# EAGLE board mini_robot (EAGLE 6.6.0)
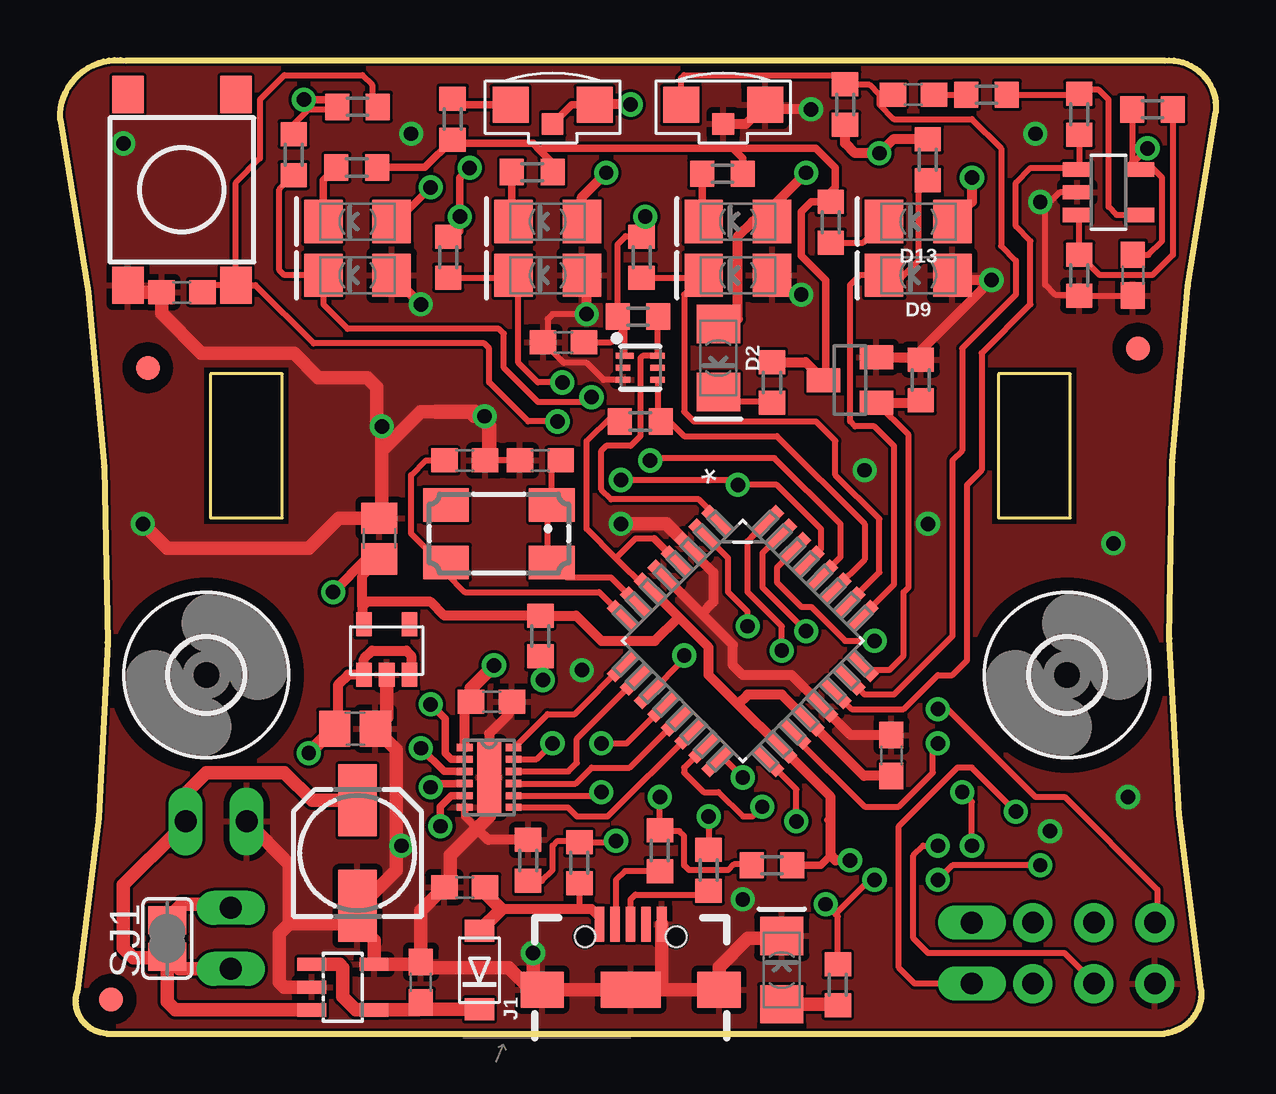
[diagram p0: board, top side]
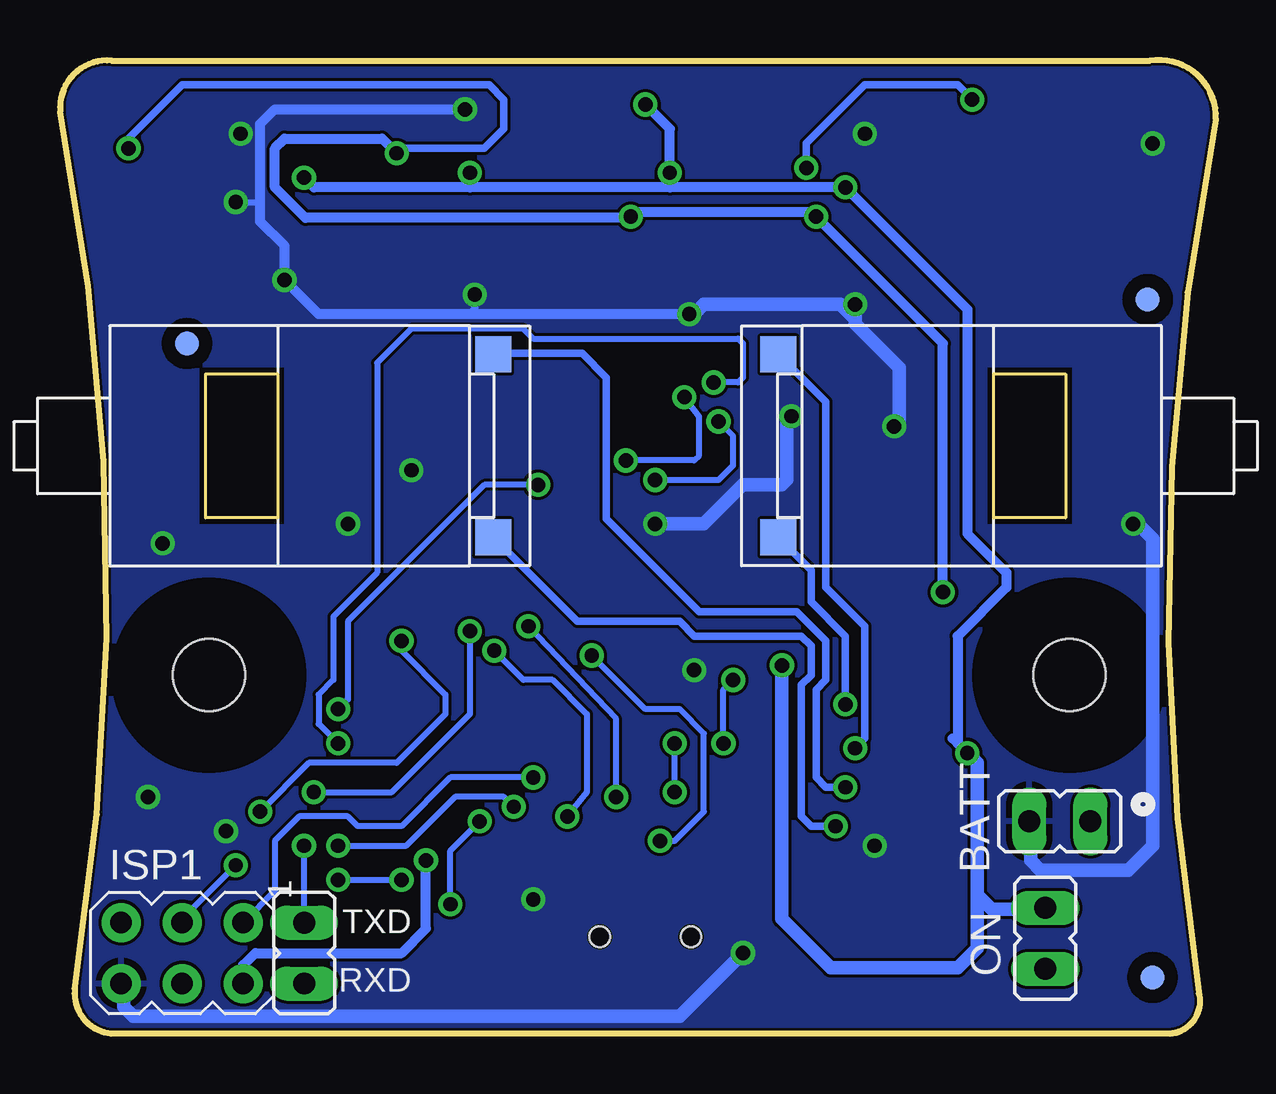
[diagram p1: board, bottom side, seen from below]

Size 48.17 x 40.56 mm. Coordinates in mm from the lower left corner, seen from the top.
Outline: 1.93,0 46.03,0 arc90 47.55,1.83 arc-20 48.16,38.41 arc100 46.03,40.54 2.74,40.54 arc100 0,38.1 arc-20 0.71,1.73 arc103 1.93,0
Copper layers (1*16): Top 0.035mm / dielectric 1.5mm / Bottom 0.035mm
Design rules "default *": minimum track width 5mil, minimum drill 24mil, track to track 5mil, track to pad 5mil, pad to pad 5mil, via to via 5mil, smd to smd 5mil, copper to edge 0.1mm, drill to drill 8mil, minimum pad ring 10mil, minimum via ring 8mil, stop-mask expansion 4mil, vias tented up to drill 0mil, thermal gap 10mil

## Footprints (pad centres in the part's own frame; a part is rotated, then mirrored left to right if it is on the bottom)
C0603 = smd 1.1 x 1: 1 -0.85,0; 2 0.85,0
C0805 = smd 1.3 x 1.5: 1 -0.85,0; 2 0.85,0
153CLV-0505 = smd 3 x 1.6: + 2.2,0; - -2.2,0
SOD-123FL = smd 0.91 x 1.22: A 1.637,0; C -1.637,0
FKIT-LED-1206 = smd 1.6 x 1.803: A -1.422,0; C 1.422,0
3,0 = hole 3: 0,0
SOT23-5 = smd 0.6 x 1.2: 1 -0.95,-1.306; 2 0,-1.306; 3 0.95,-1.306; 4 0.95,1.306; 5 -0.95,1.306
SOT23-5L = smd 0.55 x 1.2: 1 -0.95,-1.3; 2 0,-1.3; 3 0.95,-1.3; 4 0.95,1.3; 5 -0.95,1.3
AVRISP = drill 0.9 pad 1.626: 1 -1.27,2.54; 2 1.27,2.54; 3 -1.27,0; 4 1.27,0; 5 -1.27,-2.54; 6 1.27,-2.54
USB-B-MICRO-SMD = smd 1.45 x 0.4: D+ 2.725,0; D- 2.725,0.65; GND 2.725,-1.3; ID 2.725,-0.65; VBUS 2.725,1.3 | smd 1.5 x 1.8: SHIELD1 0,3.685; SHIELD2 0,-3.685 | smd 1.5 x 2.5: SHIELD3 0,0 | hole 0.85: 2.2,1.9; 2.2,-1.9
JP1 = drill 0.914 long: 1 0,-1.27; 2 0,1.27
SOT23 = smd 1 x 1.4: 1 -0.95,-1.1; 2 0.95,-1.1; 3 0,1.1
CTS406 = smd 1.9 x 1.4: 1 -2.2,-1.2; 2 2.2,-1.2; 3 2.2,1.2; 4 -2.2,1.2
R0603 = smd 1 x 1.1: 1 -0.85,0; 2 0.85,0
TACTILE_SWITCH_SMD_6.2MM_TALL = smd 1.55 x 1.3: A1 -3.975,-2.25; A2 3.975,-2.25; B1 -3.975,2.25; B2 3.975,2.25
SJ = smd 1.168 x 1.6: 1 -0.762,0; 2 0.762,0
ODFN-6 = smd 0.75 x 0.25: 1 -0.645,0.5 | smd 0.6 x 0.25: 2 -0.72,0; 3 -0.72,-0.5; 4 0.72,-0.5; 5 0.72,0; 6 0.72,0.5
SON50P200X300X80-13N = smd 0.66 x 0.305: 1 -1.016,1.245; 2 -1.016,0.762; 3 -1.016,0.254; 4 -1.016,-0.254; 5 -1.016,-0.762; 6 -1.016,-1.245; 7 1.016,-1.245; 8 1.016,-0.762; 9 1.016,-0.254; 10 1.016,0.254; 11 1.016,0.762; 12 1.016,1.245 | smd 0.991 x 3.099: 13 0,0
QFP80P900X900X120-32N = smd 1.473 x 0.508: 1 -4.242,2.794; 2 -4.242,2.007; 3 -4.242,1.194; 4 -4.242,0.406; 5 -4.242,-0.406; 6 -4.242,-1.194; 7 -4.242,-2.007; 8 -4.242,-2.794; 17 4.242,-2.794; 18 4.242,-2.007; 19 4.242,-1.194; 20 4.242,-0.406; 21 4.242,0.406; 22 4.242,1.194; 23 4.242,2.007; 24 4.242,2.794 | smd 0.508 x 1.473: 9 -2.794,-4.242; 10 -2.007,-4.242; 11 -1.194,-4.242; 12 -0.406,-4.242; 13 0.406,-4.242; 14 1.194,-4.242; 15 2.007,-4.242; 16 2.794,-4.242; 25 2.794,4.242; 26 2.007,4.242; 27 1.194,4.242; 28 0.406,4.242; 29 -0.406,4.242; 30 -1.194,4.242; 31 -2.007,4.242; 32 -2.794,4.242
FIDUCIAL_1MM = smd 1 x 1: 1 0,0
KPA3010 = smd 1.5 x 1.5: P$1_COL -1.75,0.8; P$2_EM 1.75,0.8 | smd 0.9 x 0.9: P$3-NC 0,0
PLANETARY_GEAR_MOTOR = smd 1.5 x 1.5: P$1 -13.97,3.81; P$2 -13.97,-3.81
SOT23-5' = smd 0.66 x 1: P$1 0.95,1; P$2 0,1; P$3 -0.95,1; P$4 -0.95,-1.1; P$5 0.95,-1.1

## Placement (x,y rotation side)
C1  100n  [C0603]  35.56,39.12 0 top
C2  100n  [C0603]  44.7,31.6 270 top
C3  1uF  [C0805]  13.31,20.62 90 top
C4  1uF  [C0805]  12.29,12.7 0 top
C5  1uF  [C0603]  15.04,2.13 90 top
C6  100n  [C0603]  5.08,30.89 180 top
C7  22uF  [153CLV-0505]  12.4,7.52 90 top
C8  18p  [C0603]  16.87,23.88 0 top
C9  18p  [C0603]  20.02,23.88 180 top
C10  100n  [C0603]  17.98,13.82 0 top
C11  100n  [C0603]  16.87,6.1 180 top
C12  100n  [C0603]  34.65,11.58 90 top
C13  100n  [C0603]  20.98,28.8 180 top
D1  [SOD-123FL]  17.48,2.64 90 top
D2  [FKIT-LED-1206]  27.43,28.14 270 top
D3  [FKIT-LED-1206]  30.07,2.64 90 top
D5  [FKIT-LED-1206]  12.4,31.6 180 top
D7  [FKIT-LED-1206]  20.32,31.6 180 top
D8  [FKIT-LED-1206]  28.24,31.6 180 top
D9  [FKIT-LED-1206]  35.76,31.6 180 top
D10  [FKIT-LED-1206]  12.4,33.83 180 top
D11  [FKIT-LED-1206]  20.32,33.83 180 top
D12  [FKIT-LED-1206]  28.24,33.83 180 top
D13  [FKIT-LED-1206]  35.76,33.83 180 top
H1  MOUNT-HOLE3.0  [3,0]  6.1,14.94 0 top
H2  MOUNT-HOLE3.0  [3,0]  41.96,14.94 0 top
IC2  MCP601OT  [SOT23-5]  43.69,35.05 270 top
IC3  MCP73811/2  [SOT23-5L]  11.79,1.93 270 top
ISP1  AVRISP-6  [AVRISP]  43.08,3.35 270 bottom
J1  [USB-B-MICRO-SMD]  23.77,1.83 90 top
JP1  ON  [JP1]  7.11,3.96 0 bottom
JP2  BATT  [JP1]  6.5,8.84 90 bottom
Q1  BSS123  [SOT23]  32.92,27.23 90 top
Q2  12MHz  [CTS406]  18.29,20.83 180 top
R1  47k  [R0603]  38.61,39.12 0 top
R2  4k7  [R0603]  21.64,7.11 270 top
R3  4k7  [R0603]  12.4,38.61 180 top
R4  4k7  [R0603]  24.08,29.87 0 top
R5  4k7  [R0603]  24.18,25.5 0 top
R6  470k  [R0603]  42.47,38.3 270 top
R7  47k  [R0603]  45.52,38.51 180 top
R8  47k  [R0603]  9.74,36.62 90 top
R9  330  [R0603]  12.36,36.08 180 top
R10  47k  [R0603]  16.18,32.34 90 top
R11  330  [R0603]  19.68,35.89 180 top
R12  47k  [R0603]  24.24,32.34 90 top
R13  330  [R0603]  27.6,35.82 180 top
R14  47k  [R0603]  36.16,36.4 90 top
R15  330  [R0603]  32.11,33.8 270 top
R16  330  [R0603]  16.36,38.1 90 top
R17  4k7  [R0603]  35.86,27.23 270 top
R18  47k  [R0603]  42.47,31.6 90 top
R19  330  [R0603]  32.41,2.03 90 top
R20  4k7  [R0603]  20.02,16.56 270 top
R21  330  [R0603]  29.67,27.13 270 top
R22  4k7  [R0603]  19.51,7.21 90 top
R27  68  [R0603]  24.99,7.62 270 top
R28  68  [R0603]  27.03,6.81 270 top
R29  47k  [R0603]  32.72,38.71 270 top
R30  1K5  [R0603]  29.67,7.01 180 top
S1  MOMENTARY-SWITCH-SPST-SMD-6.2MM-TALL  [TACTILE_SWITCH_SMD_6.2MM_TALL]  5.08,35.15 270 top
SJ1  [SJ]  4.47,3.96 90 top
U1  ISL29125  [ODFN-6]  24.18,27.74 0 top
U2  DRV8836DSSR  [SON50P200X300X80-13N]  17.88,10.67 0 top
U3  ATMEGA328-AU  [QFP80P900X900X120-32N]  28.45,16.36 315 top
U$1  FIDUCIAL  [FIDUCIAL_1MM]  3.66,27.74 0 top
U$2  KPA3010  [KPA3010]  27.64,37.9 0 top
U$3  FIDUCIAL  [FIDUCIAL_1MM]  44.91,28.55 0 top
U$4  FIDUCIAL  [FIDUCIAL_1MM]  2.13,1.42 0 top
U$5  FIDUCIAL  [FIDUCIAL_1MM]  42.88,28.75 0 bottom
U$6  FIDUCIAL  [FIDUCIAL_1MM]  2.64,2.34 0 bottom
U$7  FIDUCIAL  [FIDUCIAL_1MM]  2.84,30.58 0 bottom
U$8  PLANETARY_GEAR_MOTOR  [PLANETARY_GEAR_MOTOR]  4.27,24.49 0 bottom
U$9  PLANETARY_GEAR_MOTOR  [PLANETARY_GEAR_MOTOR]  44.09,24.49 180 bottom
U$10  KPA3010_EM  [KPA3010]  20.52,37.9 0 top
U$11  MIC5504-3.3Y  [SOT23-5']  13.61,15.95 180 top
USART  [JP1]  38,3.35 0 bottom

## Library data of the parts
C1-C13 R1-R22 R27-R30 = resistor
D1 IC3 ISP1 U$1 U$3-U$7 = adafruit
D2 D3 D5 D7-D13 = SparkFun-LED
H1 H2 = holes
IC2 = linear
J1 = SparkFun-Connectors; PROD_ID: CONN-11752
JP1 JP2 SJ1 USART = jumper
Q1 = transistor-small-signal
Q2 = adafruit; OC_FARNELL: unknown; OC_NEWARK: unknown
S1 = SparkFun-Switches; PROD_ID: SWCH-11966; SF_SKU: COM-12992
U1 = SparkFun-Sensors; PROD_ID: IC-12055
U2 = my_parts; MPN: DRV8836DSSR; OC_FARNELL: 2115236; OC_NEWARK: 94T6066; PACKAGE: SON-12; SUPPLIER: TEXAS INSTRUMENTS
U3 = my_parts; MPN: ATMEGA328-AU; OC_FARNELL: 1972086; OC_NEWARK: 68T2926; PACKAGE: TQFP-32; SUPPLIER: ATMEL
U$2 U$8-U$11 = my_parts

## Nets
+3V3: C2.1 C3.1 C12.1 C13.1 IC2.5 ISP1.2 R3.2 R4.1 R5.1 R7.2 R8.2 R10.2 R12.2 R14.2 R20.1 R29.2 R30.1 U1.1 U3.4 U3.6 U3.18 U3.20 U$11.P$5
ADC0: C1.1 R29.1 U3.23 U$2.P$1_COL
ADC2: D9.C R14.1 U3.25
ADC3: D8.C R12.1 U3.26
ADC5: D5.C R8.1 U3.28
ADC6: D7.C R10.1 U3.19
ADC7: IC2.1 R6.2 U3.22
APWM: U2.9 U3.13
AWAY: U2.10 U3.10
BOOT: R2.1 R22.1 U3.11
BPWM: U2.7 U3.14
BWAY: U2.8 U3.12
DM: R27.1 R30.2 U3.2
DP: R28.1 U3.32
GND: C2.2 C3.2 C4.2 C5.2 C6.2 C7.- C8.2 C9.2 C10.2 C11.2 C12.2 C13.2 D3.C D5.A D7.A D8.A D9.A IC2.2 IC3.2 IC3.5 ISP1.6 J1.GND J1.SHIELD1 J1.SHIELD2 J1.SHIELD3 JP2.2 Q1.2 R17.1 R18.1 R22.2 S1.A2 U1.3 U2.6 U2.13 U3.3 U3.5 U3.21 U$2.P$2_EM U$2.P$3-NC U$11.P$2
LED_CONTROLL: Q1.3 R9.1 R11.1 R13.1 R15.1 R16.1 R21.1
LED_CONTROLL_G: Q1.1 R17.2 U3.24
MISO: ISP1.1 U3.16
MOSI: ISP1.4 U3.15
N$1: U2.2 U$8.P$2
N$2: U2.3 U$8.P$1
N$3: U2.4 U$9.P$2
N$4: U2.5 U$9.P$1
N$5: C11.1 D1.A J1.VBUS R2.2
N$6: C5.1 D1.C IC3.1 IC3.4
N$7: C1.2 R1.1
N$9: C7.+ IC3.3 JP1.1 JP2.1 SJ1.1
N$10: R20.2 U2.11
N$11: D10.C R9.2
N$12: D11.C R11.2
N$13: D12.C R13.2
N$14: D13.C R15.2
N$16: R16.2 U$10.P$1_COL
N$17: C8.1 Q2.3 U3.8
N$18: C9.1 Q2.1 U3.7
N$19: D3.A R19.1
N$20: IC2.3 R7.1 R18.2
N$21: IC2.4 R1.2 R6.1
N$22: D2.C R21.2
N$23: J1.D- R27.2
N$24: J1.D+ R28.2
NSLEEP: U2.12 U3.9
RESET: C6.1 ISP1.5 R3.1 S1.B2 U3.29
RXD: U3.30 USART.1
SCK: ISP1.3 R19.2 U3.17
SCL: R4.2 U1.6 U3.1
SDA: R5.2 U1.4 U3.27
TXD: U3.31 USART.2
VCC: C4.1 C10.1 D2.A D10.A D11.A D12.A D13.A JP1.2 SJ1.2 U2.1 U$10.P$2_EM U$10.P$3-NC U$11.P$1 U$11.P$3

## Tracks (layer width: path | path; a pad name or v marks a point on that pad's centre or on a via)
+3V3  (via drill 0.6)
  Top 0.254: R8.2 9.74,37.88 10.36,38.51 11.44,38.51 R3.2 | R12.2 24.2,33.22 23.57,33.22 23.23,32.88 R4.1 23.54,29.56 23.54,29.36 | U1.1 23.54,29.36 | C13.1 22.98,28.8 23.54,29.36 | 31.97,8.9 32.11,9.04 | R7.2 44.67,36.33 | 44.67,36.33 IC2.5 45.06,36.07 45.52,36.07 45.92,35.66 45.92,33.02 45.35,32.45 C2.1 | 44.67,36.33 44.76,36.33 v45.31,36.88 | R5.1 22.96,25.71 21.95,24.69 21.95,21.03 23.17,19.81 | 24.6,18.58 24.4,18.58 23.17,19.81 | 24.76,20.63 23.98,20.63 23.17,19.81
  Top 0.305: U3.6 24.6,18.58 | 24.76,20.63 U3.4 | R30.1 31.7,7.01 32.11,7.42 | R10.2 16.43,33.19 16.66,33.43 16.66,33.68 16.66,35.66 v17.07,36.07 | v10.16,38.91 11.24,38.91 R3.2
  Top 0.406: 28.25,13.72 30.02,11.94 U3.18 32.11,9.86 32.11,9.04 32.11,7.42 32.31,7.21 v32.92,7.21 | 28.25,13.72 27.03,14.94 27.03,16.09 25.78,17.34 | 25.78,17.34 U3.6 | 25.78,17.34 24.79,16.36 22.56,16.36 21.5,17.41 R20.1 16.02,17.41 15.44,17.98 12.8,17.98 12.6,17.78 | v16.66,34.04 16.66,33.68 | R29.2 32.72,37.08 33.12,36.68 v34.14,36.68 34.72,37.26 R14.2 | R12.2 24.24,33.89 v24.38,34.04 | 28.25,13.72 28.65,14.12 30.07,14.12 31.13,13.07 U3.20 33.5,10.73 C12.1 | 12.6,17.78 12.6,17.12 U$11.P$5 | v11.38,18.39 12.76,19.78 C3.1 12.6,19.06 12.6,17.78
  Bottom 0.305: v17.07,36.07 17.07,37.08 14.63,39.52 10.77,39.52 v10.16,38.91 | v45.31,36.88 45.31,37.29 43.08,39.52 30.28,39.52 29.67,38.91 29.67,37.69 30.48,36.88 33.93,36.88 v34.14,36.68
  Bottom 0.406: ISP1.2 40.54,2.85 40.03,3.35 33.93,3.35 32.92,4.37 v32.92,7.21 | 24.24,33.98 24.59,33.98 | 24.59,33.98 37.94,33.98 39.22,35.26 39.22,36.88 38.81,37.29 34.75,37.29 v34.14,36.68 | 24.59,33.98 24.38,34.18 v24.38,34.04 24.18,34.24 16.87,34.24 v16.66,34.04 11.38,28.75 v11.38,18.39
ADC0
  Top 0.254: U$2.P$1_COL 25.89,39.8 26.01,39.93 32.35,39.93 R29.1 32.75,39.52 33.73,39.52 34.14,39.12 | C1.1 34.14,39.12 | 34.14,39.12 34.14,38.71 34.75,38.1 38,38.1 39.22,36.88 39.22,32.82 39.83,32.21 39.83,30.79 37.59,28.55 37.59,24.28 37.19,23.88 37.19,16.56 34.75,14.12 33.52,14.12 U3.23
ADC2
  Top 0.254: R14.1 36.16,35.45 35.76,35.05 35.76,32.21 34.95,31.39 34.54,31.39 D9.C 33.33,31.6 32.92,31.19 32.92,25.5 33.12,25.3 33.93,25.3 34.75,24.49 34.75,18.71 U3.25
ADC3
  Top 0.254: U3.26 34.14,19.21 34.14,21.44 32.31,23.27 32.31,24.69 31.5,25.5 26.42,25.5 26.01,25.91 26.01,30.78 D8.C 26.72,31.49 | R12.1 26.72,31.49 | 26.72,31.49 26.72,30.88
ADC5  (via drill 0.6)
  Top 0.254: R8.1 9.14,35.17 9.14,31.8 9.35,31.6 D5.C 10.97,30.38 11.99,29.36 18.29,29.36 18.49,29.16 18.49,27.74 19.91,26.31 21.95,26.31 v22.15,26.52 | U3.28 32.51,19.85 32.51,21.23 29.77,23.98 24.69,23.98 v24.59,23.88
  Bottom 0.254: v22.15,26.52 21.54,25.71 21.54,24.08 21.74,23.88 v24.59,23.88
ADC6  (via drill 0.6)
  Top 0.254: R10.1 18.79,31.49 D7.C 19.1,31.4 19.1,27.94 19.91,27.13 v20.93,27.13 | U3.19 30.6,12.37 33.53,9.45 34.95,9.45 36.37,10.87 36.37,11.89 v36.58,12.09
  Bottom 0.254: v20.93,27.13 19.91,27.13 19.71,27.33 19.71,28.75 19.91,28.96 28.45,28.96 28.85,29.36 33.53,29.36 34.95,27.94 34.95,19.2 36.78,17.37 36.78,14.73 37.39,14.12 37.39,12.9 v36.58,12.09
ADC7
  Top 0.254: U3.22 32.98,13.51 35.15,13.51 36.58,14.94 37.19,14.94 37.8,15.55 37.8,22.86 38.41,23.47 38.41,28.35 40.44,30.38 40.44,33.02 39.83,33.63 39.83,35.46 40.44,36.07 42.32,36.07 IC2.1 42.47,36.09 R6.2
APWM
  Top 0.254: U2.9 21.49,10.41 22.15,11.07 23.74,11.07 U3.13
AWAY
  Top 0.254: U2.10 21.18,10.92 21.54,11.28 21.54,12.29 U3.10
BOOT  (via drill 0.6)
  Top 0.254: R22.1 20.08,6.36 20.52,6.81 20.52,7.82 20.73,8.03 21.58,8.03 R2.1 23.1,7.96 v23.17,8.03 | v26.01,15.75 26.01,15.61 U3.11
  Bottom 0.254: v23.17,8.03 22.56,8.03 21.34,9.25 21.34,12.5 22.35,13.51 23.77,13.51 v26.01,15.75
BPWM
  Top 0.254: U3.14 22.82,9.04 21.54,9.04 21.16,9.42 U2.7
BWAY  (via drill 0.6)
  Top 0.254: U2.8 22.4,9.91 v22.56,10.06 | v22.56,12.09 23.61,12.09 U3.12
  Bottom 0.254: v22.56,10.06 v22.56,12.09
DM  (via drill 0.6)
  Top 0.254: R30.2 28.82,7.05 28.08,7.05 27.84,6.81 26.21,6.81 26.01,7.01 26.01,8.23 25.81,8.43 25.03,8.43 R27.1 v24.99,9.86 | v28.65,16.97 28.65,17.58 27.84,18.39 27.84,19.81 U3.2
  Bottom 0.254: v24.99,9.86 24.99,13.11 v28.65,16.97
DP  (via drill 0.6)
  Top 0.254: v27.03,9.04 R28.1 | 28.81,20.67 U3.32 28.65,20.51 28.65,18.39 30.07,16.97 v30.07,15.95
  Bottom 0.254: v30.07,15.95 28.85,14.73 27.64,14.73 26.21,13.31 26.21,10.06 v27.03,9.04
GND  (via drill 0.6)
  Top 0.254: C9.2 C8.2 | U1.3 22.65,27.24 21.95,27.94 20.99,27.94 C13.2 20.32,28.99 20.32,29.77 20.52,29.97 v21.95,29.97 | C2.2 R18.1 42.43,30.79 41.45,30.79 41.05,31.19 41.05,34.44 v40.84,34.65 41.25,34.65 41.66,35.05 IC2.2
  Top 0.305: U2.6 16.87,9.04 17.37,8.53 | 18.69,13.68 C10.2 | U3.5 25.16,19.04 26.42,17.78 | v30.89,30.79 30.48,30.79 D8.A
  Top 0.406: R22.2 17.84,8.06 17.37,8.53 | 26.74,17.49 28.04,16.19 28.04,15.34 28.45,14.94 30.48,14.94 31.74,13.68 U3.21 32.95,12.43 C12.2 | 26.74,17.49 U3.5 | 26.23,20.2 U3.3 26.29,20.14 27.23,19.2 27.23,17.98 26.74,17.49 | v17.69,25.72 17.58,25.6 | U$2.P$3-NC 28.59,37.9 U$2.P$2_EM 29.58,38.51 v31.29,38.51 | D5.A | D5.A v15.04,30.38 | v21.95,29.97 21.95,31.39 D7.A | D9.A 37.39,31.39 v38.81,31.39 35.6,28.18 Q1.2 35.77,28.18 R17.1 | 18.69,13.68 18.69,13.31 17.88,12.5 U2.13
  Top 0.559: 11.85,4.78 12.02,4.95 | 12.02,4.95 C7.- | 12.02,4.95 13.09,3.88 IC3.5 15.14,2.88 C5.2 | J1.SHIELD1 19.61,1.83 18.69,2.74 15.28,2.74 C5.2 | J1.SHIELD1 J1.SHIELD3 25.2,1.83 | 25.2,1.83 J1.SHIELD2 27.46,2.77 28.65,3.96 29.97,3.96 D3.C | J1.GND 25.07,1.95 25.2,1.83 | U2.13 17.88,9.04 17.37,8.53 16.26,7.42 16.26,6.34 C11.2 15.04,5.12 C5.2 | C7.- 12.46,5.39 12.6,5.39 14.02,6.81 14.02,11.82 C4.2 13.61,13.17 U$11.P$2 | v19.71,3.35 19.71,2.21 J1.SHIELD1 | IC3.2 9.35,1.93 9.14,2.13 9.14,4.17 9.55,4.57 | 9.55,4.57 11.65,4.57 C7.- | 9.55,4.57 9.55,7.06 JP2.2 | S1.A2 3.12,30.89 C6.2 4.23,30.01 5.89,28.35 9.75,28.35 10.77,27.33 12.8,27.33 13.21,26.92 13.21,25.5 v13.41,25.3 13.41,24.28 | v17.69,25.72 17.26,25.72 17.07,25.91 | 15.65,25.91 15.04,25.91 13.41,24.28 | 13.41,24.28 13.41,21.58 C3.2 11.62,21.48 10.36,20.22 4.47,20.22 v3.45,21.23 | v23.37,21.23 25.26,21.23 U3.3
  Top 0.61: 15.65,25.91 17.07,25.91 17.27,25.91 17.58,25.6 17.88,25.3 17.88,24.04 C8.2
  Bottom 0.254: v40.84,34.65 39.83,34.65
  Bottom 0.305: v30.89,30.79 30.89,30.18 31.09,29.97
  Bottom 0.406: v21.95,29.97 31.09,29.97 37.39,29.97 v38.81,31.39 38.81,32.82 39.83,33.83 39.83,34.65 39.83,37.9 39.22,38.51 v31.29,38.51
  Bottom 0.559: v19.71,3.35 22.35,0.71 45.11,0.71 45.52,1.12 45.52,1.98 ISP1.6 | v15.04,30.38 15.04,29.77 | 15.04,29.77 15.04,29.57 13.21,27.74 13.21,25.5 v13.41,25.3 | v21.95,29.97 21.74,29.97 21.34,30.38 15.65,30.38 15.04,29.77 | v3.45,21.23 3.25,21.23 2.64,20.63 2.64,7.82 3.66,6.81 7.32,6.81 7.72,7.21 7.72,8.79 JP2.2 | v17.69,25.72 17.88,25.53 17.88,23.06 18.09,22.86 19.71,22.86 21.34,21.23 v23.37,21.23
  other vias: 43.89,20.42 41.25,8.43 28.45,5.59 14.22,7.82 2.64,37.08 14.63,37.49 33.53,23.47 44.5,9.86 40.64,37.49 36.17,21.23 21.74,15.14
  pour Top: -1.63,42.98 55.27,42.98 55.27,-4.17 -1.63,-4.17
  pour Bottom: -9.96,44.2 52.22,44.2 52.22,-10.87 -9.96,-10.87
LED_CONTROLL
  Top 0.305: R11.1 20.53,36.27 20.02,36.78 | 20.02,36.78 19.71,37.08 16.52,37.08 R16.1 15.19,36.09 R9.1 | R13.1 28.45,36.47 28.04,36.88 | 28.04,36.88 20.12,36.88 20.02,36.78 | R15.1 31.71,34.65 | 31.71,34.65 32.31,35.26 32.31,36.07 31.5,36.88 28.04,36.88 | 31.71,34.65 31.3,34.65 30.89,34.24 30.89,32.41 31.9,31.39 31.9,27.31 Q1.3
  Top 0.406: R21.1 31.07,27.98 Q1.3
LED_CONTROLL_G
  Top 0.254: 36,26.28 Q1.1 35.36,24.94 35.36,18.59 35.15,18.39 35.15,15.75 34.54,15.14 33.62,15.14 U3.24 33.82,14.94
  Top 0.406: Q1.1 35.77,26.28 R17.2
MISO  (via drill 0.6)
  Top 0.254: U3.16 27.73,11.38 v28.45,10.67
  Bottom 0.254: ISP1.1 39.19,5.97 39.22,5.99 39.22,8.03 38.2,9.04 36.17,9.04 35.76,8.64 33.93,8.64 31.9,10.67 v28.45,10.67
MOSI  (via drill 0.6)
  Top 0.254: ISP1.4 43.08,2.13 41.86,3.35 36.17,3.35 35.56,3.96 35.56,7.42 35.97,7.82 v36.58,7.82 | U3.15 26.01,11.07 26.01,10.87 26.82,10.06 27.43,10.06 28.45,9.04 28.85,9.04 v29.26,9.45
  Bottom 0.254: v29.26,9.45 29.67,9.86 31.7,9.86 33.73,7.82 v36.58,7.82
N$1  (via drill 0.6)
  Top 0.305: U2.2 16.31,11.43 16.05,11.68 16.05,13.11 v15.44,13.72
  Bottom 0.305: v15.44,13.72 15.44,16.56 16.87,17.98 16.87,19.3 U$8.P$2
N$2  (via drill 0.6)
  Top 0.305: U2.3 16,10.92 v15.04,11.89
  Bottom 0.305: U$8.P$1 16.26,26.31 16.26,18.59 14.63,16.97 14.63,12.29 v15.04,11.89
N$3  (via drill 0.6)
  Top 0.305: U2.4 15.6,10.41 v15.44,10.26
  Bottom 0.305: v15.44,10.26 16.26,10.26 16.66,10.67 16.66,14.33 16.26,14.73 16.26,16.36 17.48,17.58 21.54,17.58 25.4,21.44 25.4,27.33 26.42,28.35 30.07,28.35 U$9.P$2 30.28,28.14
N$4  (via drill 0.6)
  Top 0.305: U2.5 16.31,9.91 15.85,9.45 v15.85,8.64
  Bottom 0.305: v15.85,8.64 16.87,8.64 17.27,9.04 17.27,14.53 16.87,14.94 16.87,16.15 17.27,16.56 21.74,16.56 22.35,17.17 26.62,17.17 U$9.P$1
N$5
  Top 0.254: R2.2 21.64,5.28 21.74,5.18
  Top 0.406: 18.38,5.18 21.74,5.18 22.15,5.18 22.47,4.86 J1.VBUS
  Top 0.559: D1.A 18.38,5.18 17.72,5.84 C11.1
N$6
  Top 0.559: IC3.1 11.65,2.88 11.79,2.74 11.79,1.52 12.33,0.98 IC3.4 14.94,0.98 C5.1 15.32,1 D1.C
N$7
  Top 0.254: C1.2 R1.1
N$9
  Top 0.559: C7.+ 10.5,9.72 9.35,10.87 6.1,10.87 5.28,10.06 5.28,8.89 JP2.1 4.88,8.48 4.88,8.43 2.64,6.2 2.64,3.56 3.05,3.15 4.42,3.15 SJ1.1 | IC3.3 4.81,0.98 4.47,1.32 SJ1.1 | JP1.1 4.98,2.69 SJ1.1
N$10  (via drill 0.6)
  Top 0.254: U2.11 19.86,11.43 v20.52,12.09 | v20.12,14.73 20.12,15.61 R20.2
  Bottom 0.254: v20.52,12.09 20.52,14.33 v20.12,14.73
N$11
  Top 0.305: D10.C 10.97,35.55 R9.2
N$12
  Top 0.254: 18.83,33.9 D11.C
  Top 0.305: 18.83,33.9 R11.2
N$13
  Top 0.305: R13.2 26.75,33.9 D12.C
N$14
  Top 0.254: R15.2 33.46,32.95 D13.C
N$16
  Top 0.305: U$10.P$1_COL 16.61,38.7 R16.2
N$17
  Top 0.254: U3.8 22.46,18.39 16.87,18.39 16.09,19.17 Q2.3 15.83,19.63 14.63,20.83 14.63,23.27 15.24,23.88 C8.1
N$18
  Top 0.254: Q2.1 20.75,22.03 | Q2.1 20.49,23.5 C9.1 | U3.7 24.02,17.94 22.96,19 21.13,19 20.32,19.81 20.32,21.86 Q2.1
N$19
  Top 0.559: D3.A 32.37,1.22 R19.1
N$20
  Top 0.254: IC2.3 42.47,34.02 R18.2 43.32,31.6 45.52,31.6 46.37,32.45 R7.1
N$21
  Top 0.254: R1.2 42.43,39.12 R6.1 42.64,39.32 43.28,39.32 43.69,38.91 43.69,34.44 44.03,34.1 IC2.4
N$22
  Top 0.254: 29.63,26.32 27.84,26.32 D2.C
  Top 0.406: 29.63,26.32 R21.2
N$23
  Top 0.254: R27.2 23.53,6.77 23.17,6.4 23.17,4.59 J1.D-
N$24
  Top 0.254: J1.D+ 23.77,5.59 23.98,5.79 26.86,5.79 R28.2
NSLEEP
  Top 0.254: U2.12 18.92,11.91 20.32,13.31 21.45,13.31 U3.9
RESET  (via drill 0.6)
  Top 0.254: S1.B2 7.33,35.46 8.33,36.46 8.33,38.91 9.35,39.93 12.6,39.93 13.01,39.52 13.01,38.85 R3.1 | S1.B2 6.22,31.18 C6.1 | S1.B2 8.14,31.18 10.57,28.75 17.68,28.75 17.88,28.55 17.88,27.13 19.51,25.5 v20.73,25.5 | U3.29 31.7,20.18 31.7,21.03 29.87,22.86 v28.25,22.86 28.04,23.06 v23.37,23.06 | v36.58,13.51 36.98,13.51 40.64,9.86 41.86,9.86 45.72,5.99 45.72,4.72 ISP1.5
  Bottom 0.254: v28.25,22.86 30.48,22.86 36.17,17.17 36.17,13.92 v36.58,13.51 | v23.37,23.06 20.73,23.06 20.12,23.67 20.12,24.89 v20.73,25.5
RXD  (via drill 0.6)
  Top 0.254: USART.1 35.61,2.08 34.95,2.74 34.95,8.64 37.39,11.07 38,11.07 v39.83,9.25 | U3.30 30.6,20.14 29.87,19.41 29.87,18.8 30.89,17.78 31.29,17.78 32.72,16.36 v33.93,16.36
  Bottom 0.254: v33.93,16.36 33.93,15.95 32.11,14.12 32.11,13.31 34.14,11.28 37.8,11.28 v39.83,9.25
SCK  (via drill 0.6)
  Top 0.254: R19.2 32.41,4.88 32.31,4.98 | 32.31,4.98 v31.9,5.39 | v30.68,8.84 30.68,10.17 U3.17 | v40.84,7.01 37.19,7.01 v36.58,6.4 | v33.93,6.4 33.73,6.4 32.31,4.98
  Bottom 0.254: v31.9,5.39 31.9,7.62 v30.68,8.84 | ISP1.3 43.08,4.78 v40.84,7.01 | v36.58,6.4 v33.93,6.4
SCL
  Top 0.254: R4.2 24.9,29.84 U1.6 24.27,28.24 24.18,28.14 24.18,24.89 23.77,24.49 22.76,24.49 22.56,24.28 22.56,22.66 22.96,22.25 26.62,22.25 27.42,21.45 U3.1
SDA
  Top 0.254: U1.4 24.9,26 25.13,25.77 | 25.13,25.77 26.01,24.89 29.87,24.89 33.53,21.23 33.53,19.75 U3.27 | R5.2 25.13,25.77
TXD  (via drill 0.6)
  Top 0.254: U3.31 30.02,20.78 29.26,20.02 29.26,18.59 v31.09,16.76 | v38,7.82 38,9.65 v37.59,10.06
  Bottom 0.254: USART.2 v38,7.82 | v31.09,16.76 31.09,13.31 34.34,10.06 v37.59,10.06
VCC  (via drill 0.6)
  Top 0.305: D10.A 14.02,33.83 v15.44,35.26 | U$10.P$2_EM 21.74,38.7 21.32,38.7 U$10.P$3-NC
  Top 0.406: v38,35.66 38,34.65 D13.A | v31.09,35.87 29.67,34.44 D12.A 28.85,33.83 28.25,33.22 28.25,29.77 27.64,29.16 D2.A | D11.A 21.74,34.85 v22.76,35.87 | v23.77,38.71 21.76,38.71 21.74,38.7 | U2.1 16.87,13.55 C10.1 | U$11.P$3 14.63,15.02 14.63,15.75 14.43,15.95 13.01,15.95 12.66,15.61 U$11.P$1 12.01,14.95 11.58,14.53 11.58,12.84 C4.1
  Top 0.559: 11.38,12.7 C4.1 | 11.55,12.87 11.38,12.7 | 17.13,13.78 C10.1 17.13,14.39 v18.09,15.34 | 11.38,12.7 v10.36,11.68 | SJ1.2 4.47,4.78 5.08,5.39 6.96,5.39 JP1.2
  Bottom 0.406: 10.97,12.29 v10.36,11.68 10.77,12.09 10.77,16.56 8.74,18.59 8.74,19.2 10.36,20.83 10.36,30.18 v15.44,35.26 22.76,35.26 | 22.76,35.26 31.09,35.26 | 31.09,35.26 37.59,35.26 v38,35.66 | v31.09,35.87 31.09,35.26 | 22.76,35.26 v22.76,35.87 22.76,37.69 v23.77,38.71
  Bottom 0.559: 9.96,5.79 9.96,11.28 v10.36,11.68 | v18.09,15.34 18.09,4.78 16.05,2.74 10.77,2.74 9.96,3.56 9.96,5.79 | 9.96,5.79 9.35,5.18 7.16,5.18 JP1.2

## Text on the board
bNames: TXD | RXD